# EAGLE board ps for AOM_Pra (EAGLE 7.5.0)
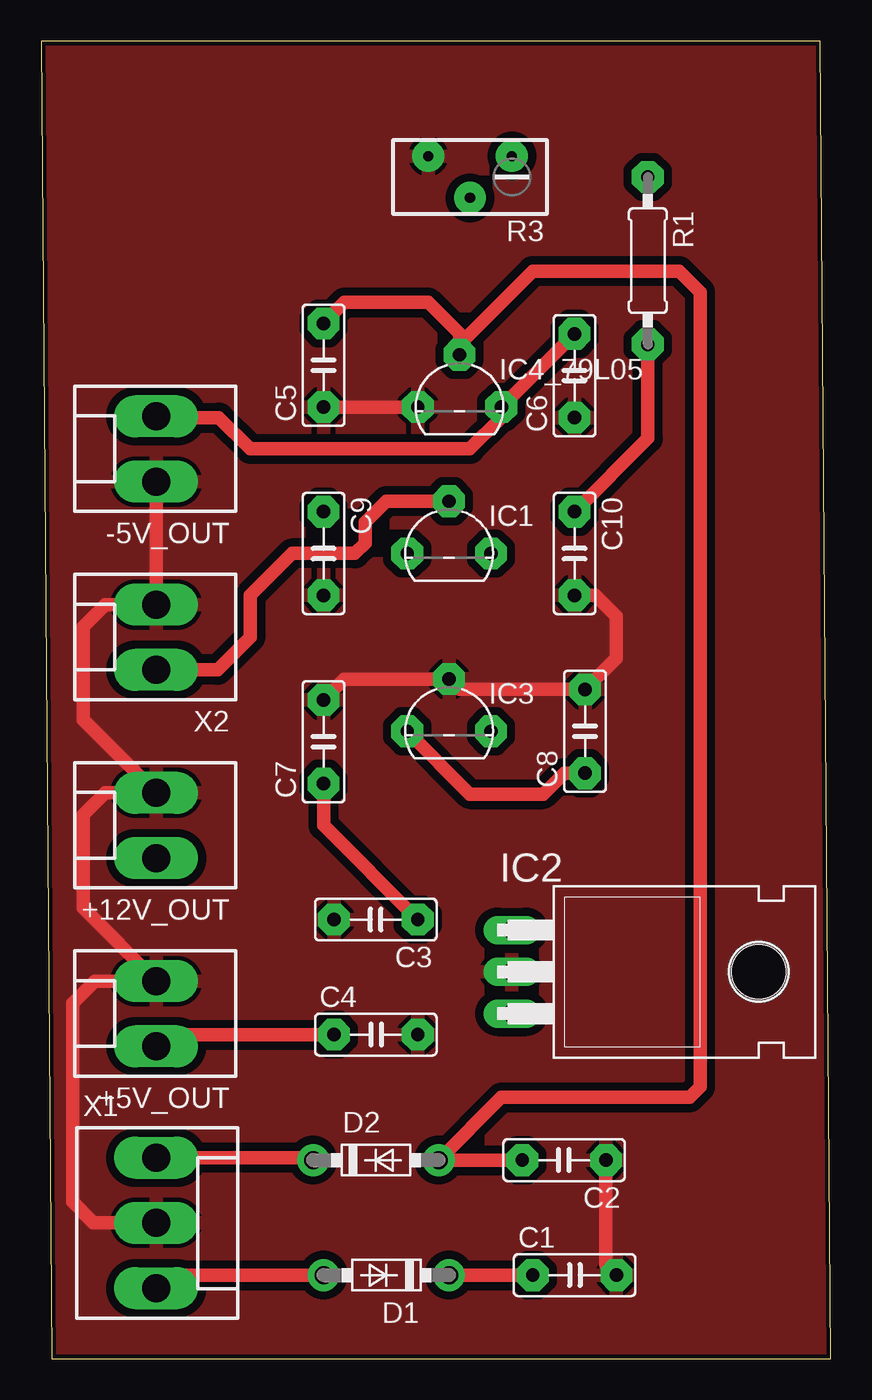
[diagram p0: board, top side]
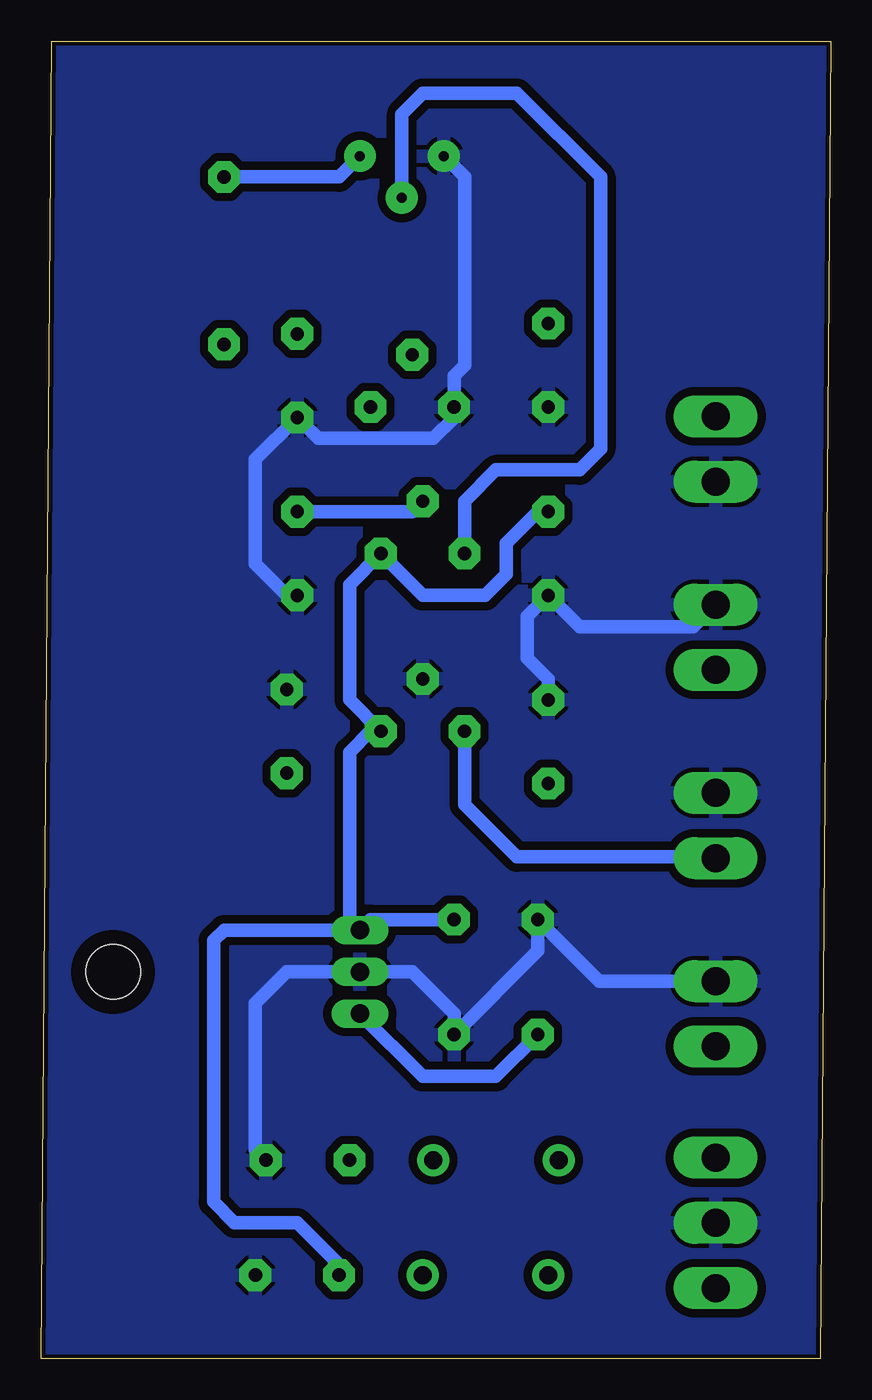
[diagram p1: board, bottom side, seen from below]

Size 47.93 x 80 mm. Coordinates in mm from the lower left corner, seen from the top.
Outline: 0.64,0 47.93,0 47.29,80 0,80 0.64,0
Copper layers (1*16): Top 0.035mm / dielectric 1.5mm / Bottom 0.035mm
Design rules "SparkFun *": minimum track width 8mil, minimum drill 20mil, track to track 20mil, track to pad 20mil, pad to pad 10mil, via to via 8mil, smd to smd 8mil, copper to edge 10mil, drill to drill 8mil, minimum pad ring 12mil, minimum via ring 10mil, stop-mask expansion 4mil, vias tented up to drill 25mil, thermal gap 10mil
Net classes: 0 default: width 0.381 mm, drill 0.254 mm, clearance 0.254 mm

## Footprints (pad centres in the part's own frame; a part is rotated, then mirrored left to right if it is on the bottom)
KK-156-2 = drill 1.7 pad 2.184 long: 1 -1.98,0; 2 1.98,0
C050-025X075 = drill 0.813 pad 1.93 octagon: 1 -2.54,0; 2 2.54,0
DO41-7.6 = drill 1.1 pad 1.93: A 3.81,0; C -3.81,0
TO92 = drill 0.813 pad 1.93 octagon: 1 -2.54,0; 2 0,3.175; 3 2.54,0
TO220H = drill 1.118 long: 1 -2.54,-10.16; 2 0,-10.16; 3 2.54,-10.16 | hole 3.302: 0,4.826
0207/10 = drill 0.813 pad 1.93 octagon: 1 -5.08,0; 2 5.08,0
RTRIM3296Y = drill 0.61 pad 1.93: 1 1.27,-2.54; 2 -1.27,0; 3 1.27,2.54
KK-156-3 = drill 1.7 pad 2.184 long: 1 -3.96,0; 2 0,0; 3 3.96,0

## Placement (x,y rotation side)
+5V_OUT  [KK-156-2]  6.98,20.95 90 top
+12V_OUT  [KK-156-2]  6.98,32.38 90 top
-5V_OUT  [KK-156-2]  6.98,55.24 90 top
C1  47uF  [C050-025X075]  32.38,5.08 0 top
C2  47uF  [C050-025X075]  31.75,12.06 180 top
C3  1uF  [C050-025X075]  20.32,26.67 180 top
C4  10uF  [C050-025X075]  20.32,19.68 0 top
C5  1uF  [C050-025X075]  17.15,60.33 90 top
C6  10uF  [C050-025X075]  32.38,59.69 90 top
C7  1uF  [C050-025X075]  17.15,37.47 90 top
C8  10uF  [C050-025X075]  33.02,38.1 90 top
C9  1uF  [C050-025X075]  17.15,48.9 270 top
C10  10uF  [C050-025X075]  32.38,48.9 270 top
D1  1N5817-B  [DO41-7.6]  20.96,5.08 180 top
D2  1N5817-B  [DO41-7.6]  20.32,12.06 0 top
IC1  LM317LZ  [TO92]  24.77,48.9 0 top
IC2  7805T  [TO220H]  38.73,23.5 270 top
IC3  78L12Z  [TO92]  24.77,38.1 0 top
IC4_79L05  [TO92]  25.4,57.78 0 top
R1  150  [0207/10]  36.83,66.67 270 top
R3  [RTRIM3296Y]  26.04,71.75 90 top
X1  [KK-156-3]  6.98,8.26 270 top
X2  [KK-156-2]  6.98,43.81 90 top

## Library data of the parts
+5V_OUT +12V_OUT -5V_OUT X1 X2 = con-molex; OC_FARNELL: unknown; OC_NEWARK: unknown
C1-C10 R1 R3 = rcl
D1 D2 = diode
IC1-IC3 IC4_79L05 = linear

## Nets
+24V: C1.1 C3.1 C7.1 C9.1 D1.C IC1.3 IC2.1 IC3.3
-24V: C2.2 C5.2 D2.A IC4_79L05.2
GND: +5V_OUT.2 +12V_OUT.2 -5V_OUT.1 C1.2 C2.1 C3.2 C4.2 C5.1 C6.1 C7.2 C8.2 C9.2 C10.2 IC2.2 IC3.2 IC4_79L05.1 R3.3 X1.2 X2.2
N$1: D2.C X1.1
N$2: D1.A X1.3
N$3: +12V_OUT.1 C8.1 IC3.1
N$4: +5V_OUT.1 C4.1 IC2.3
N$5: -5V_OUT.2 C6.2 IC4_79L05.3
N$6: R1.1 R3.1
N$7: IC1.1 R3.2
N$8: C10.1 IC1.2 R1.2 X2.1

## Tracks (layer width: path | path; a pad name or v marks a point on that pad's centre or on a via)
+24V
  Top 0.813: D1.C C1.1 | C3.1 17.15,32.38 C7.1
  Bottom 0.813: IC2.1 27.94,26.67 C3.1 | IC2.1 29.21,26.67 29.21,36.83 27.94,38.1 IC3.3 29.21,40.01 29.21,46.99 IC1.3 24.77,46.35 20.96,46.35 19.69,47.62 19.69,49.53 17.78,51.44 C9.1 | IC2.1 36.83,26.04 37.46,25.4 37.46,9.53 36.2,8.26 32.38,8.26 29.85,5.71 C1.1
-24V
  Top 0.813: C2.2 D2.A 27.94,15.88 39.37,15.88 40,16.51 40,64.77 38.73,66.04 29.85,66.04 25.4,61.59 | 25.4,61.59 IC4_79L05.2 | C5.2 18.42,64.14 23.5,64.14 25.4,62.23 25.4,61.59
GND
  Top 0.813: C1.2 34.29,5.71 C2.1 | X1.2 3.17,8.26 1.91,9.53 1.91,21.59 3.25,22.93 +5V_OUT.2 2.54,27.38 2.54,33.02 3.88,34.37 +12V_OUT.2 2.54,38.81 2.54,44.45 3.88,45.8 X2.2 -5V_OUT.1 | C10.2 33.66,46.35 34.92,45.09 34.92,42.55 C8.2 25.4,40.64 IC3.2 18.42,41.27 C7.2 | C5.1 IC4_79L05.1
  Bottom 0.813: C2.1 34.92,12.7 34.92,21.59 33.02,23.5 IC2.2 25.4,23.5 22.86,20.95 C4.2 17.78,24.77 C3.2 14.04,22.93 +5V_OUT.2 | C10.2 33.02,46.35 34.92,48.26 34.92,54.61 C6.1 31.12,55.88 24.13,55.88 22.86,57.15 IC4_79L05.1 22.86,59.69 22.23,60.33 22.23,71.75 R3.3 | X2.2 8.33,44.45 15.24,44.45 C9.2 18.42,45.09 18.42,42.55 17.15,41.27 C7.2
  pour Top: 0,80.01 50.8,80.01 50.8,-0.64 0,-0.64
  pour Bottom: -2.54,81.28 52.07,81.28 52.07,-1.27 -2.54,-1.27
N$1
  Top 0.813: D2.C 16.36,12.21 X1.1
N$2
  Top 0.813: X1.3 7.77,5.08 D1.A
N$3
  Top 0.813: IC3.1 26.04,34.29 30.48,34.29 31.75,35.56 C8.1
  Bottom 0.813: +12V_OUT.1 7.06,30.48 19.05,30.48 22.23,33.66 IC3.1
N$4
  Top 0.813: +5V_OUT.1 7.69,19.68 C4.1
  Bottom 0.813: IC2.3 24.77,17.14 20.32,17.14 C4.1
N$5
  Top 0.813: C6.2 IC4_79L05.3 27.94,57.15 26.04,55.24 12.7,55.24 10.79,57.15 7.06,57.15 -5V_OUT.2
N$6
  Bottom 0.813: R3.1 29.85,71.75 R1.1
N$7
  Bottom 0.813: R3.2 26.04,75.56 24.77,76.83 19.05,76.83 13.97,71.75 13.97,55.24 15.24,53.98 20.32,53.98 22.23,52.07 IC1.1
N$8
  Top 0.813: C10.1 36.83,55.88 R1.2 | IC1.2 20.96,52.07 19.69,50.8 19.69,49.53 19.05,48.9 15.24,48.9 12.7,46.35 12.7,43.81 10.72,41.84 X2.1
  Bottom 0.813: IC1.2 25.4,51.44 C10.1